# Altium PCB nuc5v2.PcbDoc
Units mm, origin at the board's own origin, x right, y up, seen from the top; angles counter-clockwise.
Board outline 152.4 x 101.6 mm, 2 copper layers (Top Layer, Bottom Layer); 68 components, 69 nets, 315 pads, 155 vias.
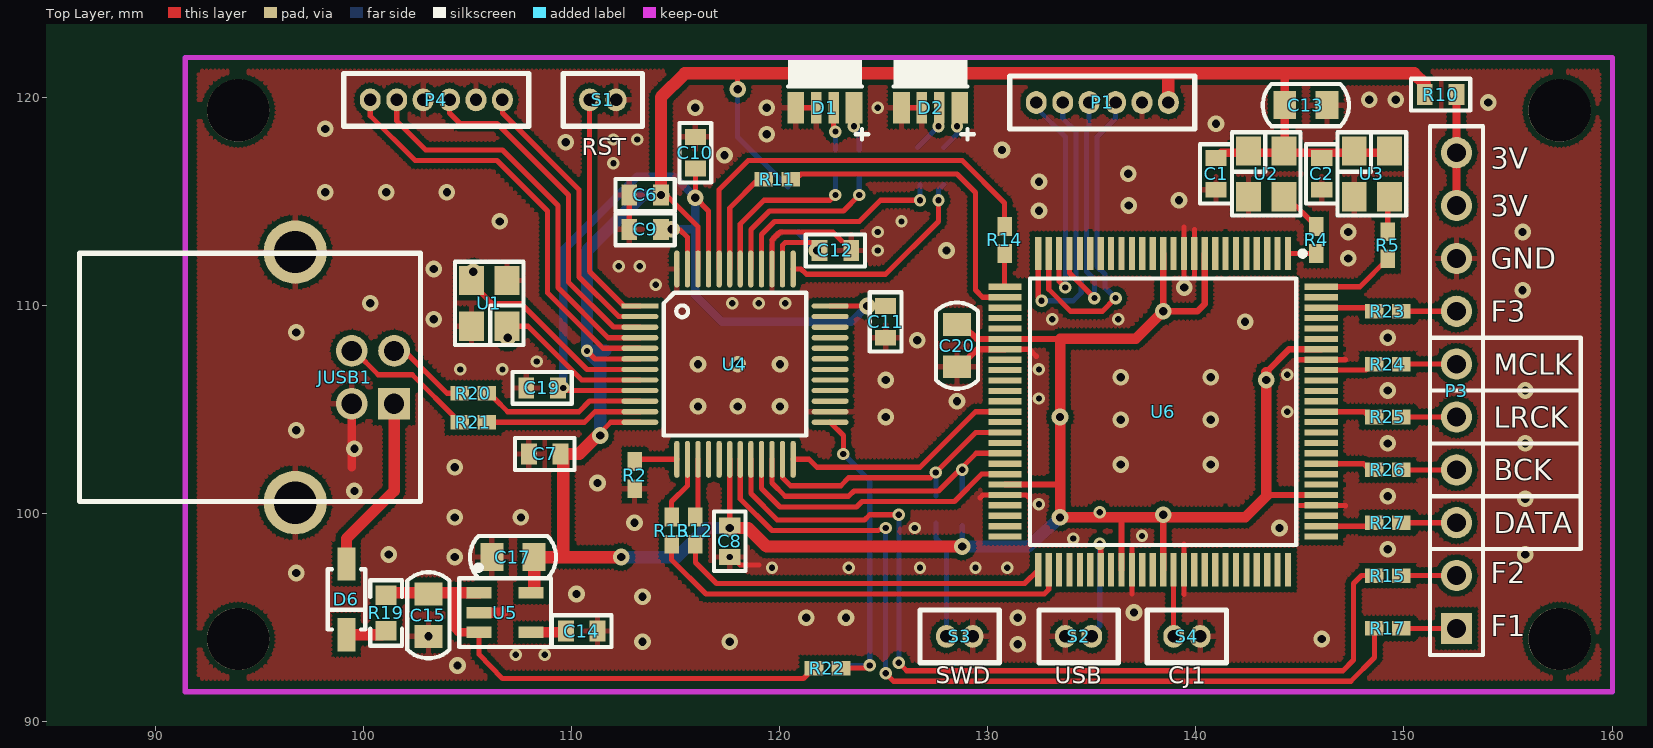
[diagram p0: Top Layer view]
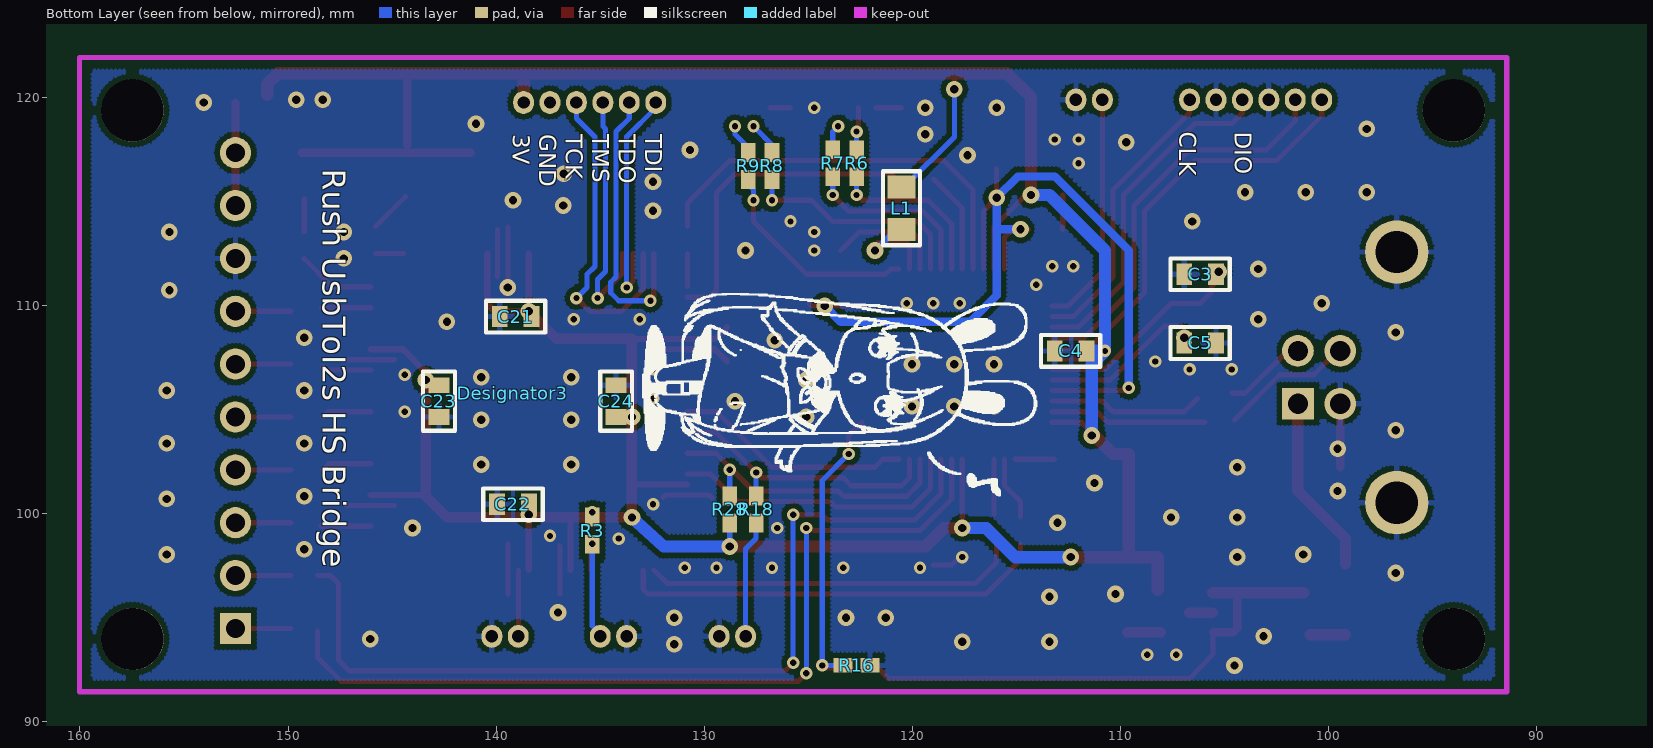
[diagram p1: Bottom Layer view, seen from below]

## Layer stack, top to bottom
Top Layer: signal copper 0.0356
Dielectric: dielectric 0.32, FR-4, Dk 4.8
Bottom Layer: signal copper 0.0356

## Board outline
25.4,25.4 177.8,25.4 177.8,127 25.4,127

## Design rules (kind name [scope] priority, off if disabled: settings)
Clearance Clearance_1 [All] p1: gap=0.254
Clearance [(InComponent('U1'))] p2: gap=0.1
ComponentClearance [All] p1 off: gap=0.254 collisioncheckmode=3 verticalgap=0.254
FanoutControl Fanout_BGA [IsBGA] p1 off: bgadir=Out bgaviamode=Centered fanoutstyle=Auto fanoutdirection=Alternating viagrid=0.025 // Fanout_BGA (Default Rule)
FanoutControl Fanout_LCC [IsLCC] p2 off: bgadir=Out bgaviamode=Centered fanoutstyle=Auto fanoutdirection=Alternating viagrid=0.025 // Fanout_LCC (Default Rule)
FanoutControl Fanout_SOIC [IsSOIC] p3 off: bgadir=Out bgaviamode=Centered fanoutstyle=Auto fanoutdirection=Alternating viagrid=0.025 // Fanout_SOIC (Default Rule)
FanoutControl Fanout_Small [(CompPinCount < 5)] p4 off: bgadir=Out bgaviamode=Centered fanoutstyle=Auto fanoutdirection=OutThenIn viagrid=0.025 // Fanout_Small (Default Rule)
FanoutControl Fanout_Default [All] p5 off: bgadir=Out bgaviamode=Centered fanoutstyle=Auto fanoutdirection=Alternating viagrid=0.025 // Fanout_Default (Default Rule)
Height [All] p1 off: minheight=0 maxheight=25.4 prefheight=12.7
HoleSize [All] p1 off: absolutevalues=TRUE maxlimit=2.54 minlimit=0.025 maxpercent=80.000 minpercent=20.000
LayerPairs [All] p1 off: enforce=TRUE
PasteMaskExpansion [All] p1 off: expansion=0
PolygonConnect [All] p1: connectstyle=Relief reliefconductorwidth=0.254 reliefentries=4 polygonreliefangle="90 Angle"
RoutingCorners [All] p1 off: cornerstyle=45-Degree minsetback=2.54 maxsetback=2.54
RoutingLayers [All] p1 off: top layer_v5=TRUE bottom layer_v5=TRUE
RoutingPriority [All] p1 off: routingpriority=0
RoutingTopology [All] p1 off: topology=Shortest
RoutingVias [All] p1: holewidth=0.711 width=1.27 viastyle="Through Hole" minholewidth=0.711 minwidth=1.27 maxholewidth=0.711 maxwidth=1.27
SolderMaskExpansion [All] p1 off: expansion=0.102
TestPointUsage [All] p1 off: valid=0 allowmultiple=FALSE
Testpoint [All] p1 off: side=15 testpointundercomponent=TRUE minsize=1.016 maxsize=2.54 preferedsize=1.524 minholesize=0 maxholesize=1.016 preferedholesize=0.813 testpointgrid=0.025 style=1023 order=0123456789
Width [All] p1: maxlimit=1 minlimit=0.2 preferedwidth=0.3 toplayer_prefwidth=0.25 bottomlayer_prefwidth=0.25 minimp=50.000000 maximp=50.000000 favimp=50.000000
4 further rules are at their usual default settings.

## Components (designator, comment, footprint, x,y, rotation, side; value= is the part's Value field where it differs from the comment)
C1 "104" 0603 140.97,115.57 r90 top
C2 "104" 0603 146.05,117.094 r270 top
C3 "22p" 0603 105.41,111.506 r0 bottom
C4 "0.1" 0603 111.633,107.823 r0 bottom
C5 "22p" 0603 105.41,108.204 r0 bottom
C6 "0.1" 0603 114.3,115.316 r180 top
C7 "0.1" 0603 107.95,102.87 r0 top
C8 "0.1" 0603 117.602,99.441 r270 top
C9 "0.1" 0603 114.3,113.665 r180 top
C10 "0.1" 0603 115.951,116.586 r90 top
C11 "4.7u" 0603 125.095,109.982 r270 top
C12 "1" 0603 121.92,112.649 r0 top
C13 "10uF" CC0805CAP 145.288,119.634 r180 top
C14 "0.1" 0603 109.728,94.361 r0 top
C15 "10uF" CC0805CAP 103.124,95.123 r90 top
C17 "10uF" CC0805CAP 107.188,97.917 r0 top
C19 "0.1" 0603 109.347,106.045 r180 top
C20 "10u" CC0805CAP 128.524,108.077 r270 top
C21 "0.1" 0603 139.827,109.474 r180 bottom
C22 "0.1" 0603 139.954,100.457 r180 bottom
C23 "0.1" 0603 142.748,104.648 r90 bottom
C24 "0.1" 0603 134.239,106.172 r270 bottom
D1 "DLED" LED1204 122.174,119.507 r270 top
D2 "DLED" LED1204 127.254,119.507 r270 top
D6 "MBR520" SOD123 99.187,95.885 r90 top
Designator3 "Comment" LOGO2 139.192,105.791 r0 bottom
JUSB1 "USB_B" USB-B-M 101.473,105.283 r90 top
L1 "10uH" CC0805RES 120.523,114.681 r270 bottom
P1 "Header 6" 密脚针1.27mm*6 132.334,119.761 r0 top
P3 "Header 10" HDR1X10 152.527,94.488 r90 top locked
P4 "Header 6" 密脚针1.27mm*6 100.33,119.888 r0 top
R2 "12.1K 1%" CR1005-0402 113.03,101.854 r270 top
R3 "1K" CR1005-0402 135.382,99.187 r90 bottom
R4 "22" CR1005-0402 145.796,113.157 r270 top
R5 "22" CR1005-0402 149.225,112.903 r270 top
R6 "2.2k" CR1005-0402 122.682,116.84 r90 bottom
R7 "10k" CR1005-0402 123.825,116.84 r90 bottom
R8 "2.2k" CR1005-0402 126.746,116.713 r90 bottom
R9 "10k" CR1005-0402 127.889,116.713 r90 bottom
R10 "0" 0603 151.003,120.142 r0 top
R11 "220" CR1005-0402 119.888,116.078 r0 top
R12 "220" CR1005-0402 115.951,99.187 r90 top
R13 "220" CR1005-0402 114.808,99.187 r270 top
R14 "220" CR1005-0402 130.81,113.157 r90 top
R15 "220" CR1005-0402 149.225,97.028 r180 top
R16 "20K" CR1005-0402 122.682,92.71 r0 bottom
R17 "220" CR1005-0402 149.225,94.488 r180 top
R18 "1K" CR1005-0402 127.508,100.203 r270 bottom
R19 "2.2" CC0603RES 101.092,95.231 r90 top
R20 "22" CR1005-0402 105.283,105.791 r180 top
R21 "22" CR1005-0402 105.283,104.394 r180 top
R22 "20K" CR1005-0402 122.301,92.583 r180 top
R23 "220" CR1005-0402 149.225,109.728 r0 top
R24 "220" CR1005-0402 149.225,107.188 r180 top
R25 "220" CR1005-0402 149.225,104.648 r180 top
R26 "220" CR1005-0402 149.225,102.108 r0 top
R27 "220" CR1005-0402 149.225,99.568 r0 top
R28 "10K" CR1005-0402 128.778,100.203 r270 bottom
S1 "RESET" 密脚针1.27mm*2 112.141,119.888 r180 top
S2 "USBOOT" 密脚针1.27mm*2 133.731,94.107 r0 top
S3 "SWBOOT" 密脚针1.27mm*2 129.286,94.107 r180 top
S4 "CLKJ1" 密脚针1.27mm*2 140.208,94.107 r180 top
U1 "12M 3225" OSC-3225 106.045,110.109 r90 top
U2 "7050 OSC" OSC-3225 143.383,116.332 r270 top
U3 "7050 OSC" OSC-3225 148.463,116.332 r270 top
U4 "NUC505YL" LQFP-48 113.284,109.982 r270 top
U5 "LDO3.3V" SOT23-5 106.807,95.25 r90 top
U6 "EPM240T100C5" TQFP100 138.43,104.902 r270 top

## Footprints (in the part's own frame and the unit in brackets; to place one, negate y for a bottom-side part, rotate by r counter-clockwise, add the part's x,y. Pads: shape width x height; smd on the part's side, far side on the other; paste and mask are expansions set on the pad)
0603 [mil]
  rect 30x40 smd: 1(0,0) 2(60,0)
  silkscreen extent -26,-30 86,30
CC0603RES [mm]
  rect 0.95x1 smd: 1(-0.85,0) 2(0.85,0)
  silkscreen extent -1.57,-0.76 1.57,0.76
CC0805CAP [mm] "Chip Capacitor; Body 2.0 x 1.2 mm (LxW typ)"
  rect 1.1x1.35 smd: 1(-1.016,0) 2(1.016,0)
  silkscreen extent -2.07,-1.02 2.07,1.02
CC0805RES [mm] "Chip Capacitor; Body 2.0 x 1.2 mm (LxW typ)"
  rect 1.1x1.35 smd: 1(-1.016,0) 2(1.016,0)
  silkscreen extent -1.78,-0.89 1.78,0.89
CR1005-0402 [mm] "Chip Resistor; Body 1.1 x 0.5 mm (LxW typ)"
  rect 0.9x0.7 smd: 1(-0.65,0) 2(0.65,0)
HDR1X10 [mm] "Connector; Header; 10 Position"
  rect 1.5x1.5 hole 0.9: 1(0,0)
  round 1.5 hole 0.9: 2(2.54,0) 3(5.08,0) 4(7.62,0) 5(10.16,0) 6(12.7,0) 7(15.24,0) 8(17.78,0) 9(20.32,0) 10(22.86,0)
  silkscreen extent -1.27,-1.27 24.13,1.27
LED1204 [mm]
  rect 1.5x0.5 smd: 1(0,-0.42) 2(0,0.42)
  rect 1.5x0.8 smd: 3(0,-1.4) 4(0,1.4)
  silkscreen extent -2.01,-1.78 1.52,2.08
LOGO2 [mm]
  silkscreen extent -25.16,-4.77 -6.26,4.91
LQFP-48 [mil]
  rect 10x70 smd: 1(0,0)
  oval 10x70 smd: 2(20,0) 3(40,0) 4(60,0) 5(80,0) 6(100,0) 7(120,0) 8(140,0) 9(160,0) 10(180,0) 11(200,0) 12(220,0) 25(220,360) 26(200,360) 27(180,360) 28(160,360) 29(140,360) 30(120,360) 31(100,360) 32(80,360) 33(60,360) 34(40,360) 35(20,360) 36(0,360)
  oval 70x10 smd: 13(290,70) 14(290,90) 15(290,110) 16(290,130) 17(290,150) 18(290,170) 19(290,190) 20(290,210) 21(290,230) 22(290,250) 23(290,270) 24(290,290) 37(-70,290) 38(-70,270) 39(-70,250) 40(-70,230) 41(-70,210) 42(-70,190) 43(-70,170) 44(-70,150) 45(-70,130) 46(-70,110) 47(-70,90) 48(-70,70)
  silkscreen extent -25,45 245,315
OSC-3225 [mm] "3225晶振"
  rect 1.4x1.2 smd: 1(-1.1,-0.85) 2(1.1,-0.85) 3(1.1,0.85) 4(-1.1,0.85)
  silkscreen extent -2,-1.65 2,1.65
SOD123 [mm] "SOD-123; 2 Leads; Body 2.7 x 1.6 mm, (LxW)"
  rect 1.6x0.85 smd: 1(1.7,0) 2(-1.7,0)
  silkscreen extent -1.45,-0.9 1.45,0.9
SOT23-5 [mm] "SOT-23/SC-74A; 5 Leads; Body 3.1 x 3.1 mm, inc. leads (LxW max)"
  rect 0.55x1.2 smd: 1(0.95,1.25) 2(0,1.25) 3(-0.95,1.25) 4(-0.95,-1.25) 5(0.95,-1.25)
  silkscreen extent -1.65,-2.2 2.29,2.2
TQFP100 [mm] "100-Pin Plastic Thin Quad Flat Pack (TQFP)"
  rect 1.6x0.3 smd: 1(-7.6,6) 2(-7.6,5.5) 3(-7.6,5) 4(-7.6,4.5) 5(-7.6,4) 6(-7.6,3.5) 7(-7.6,3) 8(-7.6,2.5) 9(-7.6,2) 10(-7.6,1.5) 11(-7.6,1) 12(-7.6,0.5) 13(-7.6,0) 14(-7.6,-0.5) 15(-7.6,-1) 16(-7.6,-1.5) 17(-7.6,-2) 18(-7.6,-2.5) 19(-7.6,-3) 20(-7.6,-3.5) 21(-7.6,-4) 22(-7.6,-4.5) 23(-7.6,-5) 24(-7.6,-5.5) 25(-7.6,-6) 51(7.6,-6) 52(7.6,-5.5) 53(7.6,-5) 54(7.6,-4.5) 55(7.6,-4) 56(7.6,-3.5) 57(7.6,-3) 58(7.6,-2.5) 59(7.6,-2) 60(7.6,-1.5) 61(7.6,-1) 62(7.6,-0.5) 63(7.6,0) 64(7.6,0.5) 65(7.6,1) 66(7.6,1.5) 67(7.6,2) 68(7.6,2.5) 69(7.6,3) 70(7.6,3.5) 71(7.6,4) 72(7.6,4.5) 73(7.6,5) 74(7.6,5.5) 75(7.6,6)
  rect 0.3x1.6 smd: 26(-6,-7.6) 27(-5.5,-7.6) 28(-5,-7.6) 29(-4.5,-7.6) 30(-4,-7.6) 31(-3.5,-7.6) 32(-3,-7.6) 33(-2.5,-7.6) 34(-2,-7.6) 35(-1.5,-7.6) 36(-1,-7.6) 37(-0.5,-7.6) 38(0,-7.6) 39(0.5,-7.6) 40(1,-7.6) 41(1.5,-7.6) 42(2,-7.6) 43(2.5,-7.6) 44(3,-7.6) 45(3.5,-7.6) 46(4,-7.6) 47(4.5,-7.6) 48(5,-7.6) 49(5.5,-7.6) 50(6,-7.6) 76(6,7.6) 77(5.5,7.6) 78(5,7.6) 79(4.5,7.6) 80(4,7.6) 81(3.5,7.6) 82(3,7.6) 83(2.5,7.6) 84(2,7.6) 85(1.5,7.6) 86(1,7.6) 87(0.5,7.6) 88(0,7.6) 89(-0.5,7.6) 90(-1,7.6) 91(-1.5,7.6) 92(-2,7.6) 93(-2.5,7.6) 94(-3,7.6) 95(-3.5,7.6) 96(-4,7.6) 97(-4.5,7.6) 98(-5,7.6) 99(-5.5,7.6) 100(-6,7.6)
  silkscreen extent -7.72,-6.4 6.4,6.83
USB-B-M [mil]
  rect 60x60 hole 38: 1(0,0)
  round 60 hole 38: 2(100,0) 3(100,80) 4(0,80)
  round 120 hole 80: 5(-187,187) 5(287,187)
  silkscreen extent -185,-50 285,595
密脚针1.27mm*2 [mm]
  oval 1x1.1 hole 0.6: 1(0,0) 2(1.27,0)
  silkscreen extent -1.27,-1.27 2.54,1.27
密脚针1.27mm*6 [mm]
  oval 1x1.1 hole 0.6: 1(0,0) 2(1.27,0) 3(2.54,0) 4(3.81,0) 5(5.08,0) 6(6.35,0)
  silkscreen extent -1.27,-1.27 7.62,1.27

## Part data
C1 C2: library part Cap6, "Capacitor0603"
C3 C4 C5 C6 C7 C8 C9 C10 C11 C12 C19 C21 C22 C23 C24: library part CAP, "Capacitor"
C13 C14 C15 C17 C20: library part Cap8, "Capacitor0805"
D1 D2: library part LED1204, "1204˫ɫLED"
D6: library part Diode, "Default Diode"
JUSB1: "USB Mini/Micro 5P"
L1: library part Res8, "Resistor0805"
P1 P4: "Header, 6-Pin"
P3: "Header, 10-Pin"
R2 R3 R4 R5 R6 R7 R8 R9 R10 R11 R12 R13 R14 R15 R17 R18 R19 R20 R21 R23 R24 R25 R26 R27 R28: library part Res6, "Resistor0603"
R16 R22: library part R, "贴片电阻"
S1 S2 S4: library part SW-PB
S3: library part SW-PB, "Switch"
U1: library part XTAL
U2 U3: library part XTAL_OSC
U5: library part LP2985-5, "LP2985 5V LDO"
U6: "MAX II 2.5/3.3V CPLD, 80 I/Os, 100-Pin Plastic TQFP, Commercial Temperature, Speed Grade 5"

## Free pads (board coordinates)
  round 3 hole 3 unplated: ""(93.98,93.98) ""(93.98,119.38) ""(157.48,93.98) ""(157.48,119.38)

## Via types
v1: diameter 0.8, hole 0.4, Top Layer to Bottom Layer, 97 vias
v2: diameter 0.6, hole 0.3, Top Layer to Bottom Layer, 58 vias

## Nets (pads, with @x,y where several pads share a name; then routed paths per layer and width w, separated by ;. In a path a pad name is that pad's centre, name@x,y a point inside that pad or via, vN(x,y) a via of type N, cw(c..) or ccw(c..) an arc to the next point about the centre after c; other vN are vias at no path point)
BCK2: R26.1 U6.83 | length 2.4
  Top Layer w0.25: U6.83 148.042,102.402 R26.1@148.336,102.108
BCKO: P3.4 R26.2 | length 2.7
  Top Layer w0.25: R26.2 P3.4
CLK1: R4.1 U2.3 | length 2
  Top Layer w0.25: U2.3@144.371,115.232 R4.1
CLK1': R4.2 U6.1 | length 1.4
  Top Layer w0.25: U6.1 R4.2@145.791,112.502
CLK2: R5.1 U3.3 | length 1.6
  Top Layer w0.25: R5.1 U3.3@149.225,115.144
CLK2': R5.2 U6.100 | length 3.8
  Top Layer w0.25: U6.100 147.874,110.902 R5.2
CLKJMP: S4.2 U6.64 | length 3.1
  Top Layer w0.25: S4.2@138.93,94.242 U6.64
D+: R21.1 U4.11 | length 7.6
  Top Layer w0.25: R21.1 110.617,104.394 111.125,104.902 U4.11
D-: R20.1 U4.10 | length 7.5
  Top Layer w0.25: R20.1@106.299,105.537 106.934,104.902 110.363,104.902 110.871,105.41 U4.10
DATAO: P3.3 R27.2 | length 2.7
  Top Layer w0.25: R27.2 P3.3
DM: JUSB1.2 R20.2 | length 3.5
  Top Layer w0.254: JUSB1.2@101.981,107.823 104.013,105.791 R20.2
DP: JUSB1.3 R21.2 | length 6.3
  Top Layer w0.254: JUSB1.3@99.568,107.823 100.711,106.68 102.347,106.68 R21.2@104.506,104.521
F1: P3.1 R17.1 | length 2.7
  Top Layer w0.25: R17.1 P3.1
F2: P3.2 R15.1 | length 2.7
  Top Layer w0.25: R15.1 P3.2
F3: P3.7 R23.2 | length 2.7
  Top Layer w0.25: R23.2 P3.7
GND: C1.1 C2.2 C3.2 C4.2 C5.1 C6.2 C7.1 C8.2 C9.2 C10.2 C11.2 C12.2 C13.1 C14.2 C15.1 C17.1 C19.2 C20.2 C21.1 C22.1 C23.1 C24.1 D1.1 D1.3 D2.1 D2.3 JUSB1.4 JUSB1.5 P1.5 P3.8 P4.3 P4.5 R2.2 R16.1 S1.1 S2.1 S3.1 S4.1 U1.2 U1.4 U2.2 U3.2 U4.26 U4.39 U4.48 U5.2 U6.10 U6.11 U6.32 U6.46 U6.60 U6.65 U6.79 U6.93 | length 35.8
  Top Layer w0.25: C8.2@117.856,97.79 118.11,97.536 118.999,97.536 ; U4.39 119.634,113.157 120.015,113.538 122.555,113.538 C12.2 ; D1.3@120.523,119.507 D1.1 ; D2.3 D2.1 ; 129.642,100.768 129.776,100.902 131.871,100.902 131.986,100.787 ; U6.32 132.001,107.902 132.334,107.569 ; 136.93,96.138 136.93,98.431 136.957,98.458 ; 139.43,96.133 139.43,98.536 ; v1@139.43,110.887 139.43,113.776 ; 139.93,111.38 139.93,113.652 ; 144.88,107.402 147.18,107.402 ; 144.896,100.402 147.164,100.402 147.186,100.381
  Top Layer w0.254: C9.2 C6.2
  Top Layer w0.3: C20.2@128.905,107.315 129.492,107.902 U6.32
  Top Layer w0.4: 99.441,102.231 JUSB1.4
  Top Layer w0.5: U5.2 106.705,95.25
  other v1: 104.521,92.71 131.445,93.726 113.411,93.853 117.602,93.853 146.05,93.98 103.124,94.107 121.285,94.996 123.19,94.996 131.445,94.996 137.033,95.25 113.411,96.012 110.236,96.139 96.774,97.155 104.394,97.917 101.219,98.044 155.829,98.044 149.225,98.298 144.018,99.314 113.03,99.568 104.394,99.822 107.569,99.822 155.829,100.711 149.225,100.838 99.568,101.092 111.252,101.473 104.394,102.235 136.398,102.362 140.716,102.362 99.568,103.124 149.225,103.378 155.829,103.378 96.774,104.013 136.398,104.521 140.716,104.521 125.095,104.648 116.078,105.156 117.983,105.156 120.015,105.156 128.524,105.41 149.225,105.918 155.829,105.918 125.095,106.426 136.398,106.553 140.716,106.553 116.078,107.188 117.983,107.188 120.015,107.188 126.619,108.331 149.225,108.458 96.774,108.712 142.367,109.22 103.378,109.347 100.33,110.109 155.702,110.744 139.446,110.871 103.378,111.76 147.32,112.268 128.016,112.649 147.32,113.538 155.702,113.538 106.553,114.046 132.461,114.554 136.779,114.808 139.192,115.062 98.171,115.443 101.092,115.443 104.013,115.443 132.461,115.951 136.754,116.332 117.348,117.221 130.683,117.475 109.728,117.856 119.38,118.237 98.171,118.491 140.97,118.745 115.951,119.507 119.38,119.507 154.051,119.761 148.336,119.888 149.606,119.888
  other v2: 107.315,93.218 108.712,93.218 119.634,97.409 123.317,97.409 126.746,97.409 129.413,97.409 130.937,97.409 117.602,97.917 134.112,98.806 137.414,98.933 126.492,99.314 132.461,100.457 144.399,104.902 132.461,105.537 144.399,106.68 104.648,106.934 106.68,106.934 132.461,106.934 108.331,107.315 133.096,109.347 136.271,109.347 117.729,110.109 118.999,110.109 120.269,110.109 114.046,110.998 112.268,111.887 113.284,111.887 124.714,112.649 124.714,113.538 125.857,114.046 112.014,116.84 112.014,117.983 113.157,117.983 124.714,119.507
HSE-I: C3.1 U1.3 U4.7 | length 9.9
  Top Layer w0.25: U1.3@105.322,111.209 105.62,110.911 105.62,110.661 106.172,110.109 107.569,110.109 110.744,106.934 U4.7
  other v1: 105.283,111.633
HSE-O: C5.2 U1.1 U4.8 | length 7.3
  Top Layer w0.25: U1.1@107.022,109.009 107.907,109.009 110.49,106.426 U4.8
  other v1: 106.934,108.458
LRCK2: R25.2 U6.88 | length 2.4
  Top Layer w0.25: U6.88 148.082,104.902 R25.2@148.336,104.648
LRCKO: P3.5 R25.1 | length 2.7
  Top Layer w0.25: R25.1 P3.5
MCLK2: R24.2 U6.92 | length 2.4
  Top Layer w0.25: U6.92 148.177,106.902 R24.2@148.336,107.061
MCLKO: P3.6 R24.1 | length 2.7
  Top Layer w0.25: R24.1 P3.6
MCUBCK: R12.1 U6.51 | length 18
  Top Layer w0.25: R12.1 115.951,97.663 116.967,96.647 131.775,96.647 U6.51
MCUDI: R11.2 U6.27 | length 15.6
  Top Layer w0.25: R11.2 120.777,116.078 121.031,116.332 128.524,116.332 129.413,115.443 129.413,110.744 129.755,110.402 U6.27
MCUDO: R14.1 U6.26 | length 1.6
  Top Layer w0.25: U6.26@130.81,110.922 R14.1
MCULRCK: R13.2 U6.52 | length 20.6
  Top Layer w0.25: R13.2 114.808,97.79 116.459,96.139 132.715,96.139 132.93,96.354 U6.52
NetC14_1: C14.1 U5.4 | length 1.7
  Top Layer w0.25: C14.1@109.667,94.3 C14.1
  Top Layer w0.5: U5.4 C14.1@109.667,94.3
NetC15_2: C15.2 R19.2 R22.2 U5.1 U5.3 | length 25.2
  Top Layer w0.25: U5.3 105.557,93.249 106.68,92.075 121.143,92.075 R22.2
  Top Layer w0.4: 104.394,96.2 104.394,94.488 104.582,94.3 U5.3
  Top Layer w0.55: R19.2@101.192,96.2 U5.1
NetD1_2: D1.2 R6.2 | length 2.1
  Top Layer w0.25: v2@122.594,118.452 D1.2
  Bottom Layer w0.25: R6.2 v2(122.682,118.364) v2@122.824,118.364
NetD1_4: D1.4 R7.2 | length 1.2
  Bottom Layer w0.25: v2(123.571,118.618) 123.825,118.364 R7.2
NetD2_2: D2.2 R8.2 | length 1.4
  Bottom Layer w0.25: R8.2@126.619,117.602 v2(127.635,118.618)
NetD2_4: D2.4 R9.2 | length 1.3
  Bottom Layer w0.25: R9.2@127.889,117.602 128.524,118.237 v2(128.524,118.618)
NetP3_9: P3.9 P3.10 R10.2 | length 5
  Top Layer w0.4: P3.9 R10.2@152.527,119.761
NetR2_1: R2.1 U4.13 | length 1.9
  Top Layer w0.25: R2.1@113.172,102.616 U4.13
PA0: R8.1 U4.40 | length 10.7
  Top Layer w0.25: U4.40 119.126,113.411 119.761,114.046 123.825,114.046 124.841,115.062 v2(126.746,115.062)
  Bottom Layer w0.25: v2(126.746,115.062) R8.1@126.746,115.809
PA1: R7.1 U4.41 | length 8.7
  Top Layer w0.25: U4.41 118.618,113.665 119.507,114.554 123.063,114.554 v2(123.825,115.316)
  Bottom Layer w0.25: v2(123.825,115.316) R7.1
PA2: R6.1 U4.42 | length 8.2
  Top Layer w0.25: U4.42 118.11,113.919 119.253,115.062 122.428,115.062 v2(122.682,115.316)
  Bottom Layer w0.25: v2(122.682,115.316) R6.1
PA3: R11.1 U4.43 | length 4.9
  Top Layer w0.25: U4.43 117.602,114.696 R11.1@118.984,116.078
PA4: R14.2 U4.44 | length 20.1
  Top Layer w0.25: U4.44 117.094,115.57 118.491,116.967 128.778,116.967 130.81,114.935 R14.2
PA8: R13.1 U4.14 | length 3.1
  Top Layer w0.25: R13.1 114.808,100.584 115.57,101.346 U4.14
PA9: R12.2 U4.15 | length 2.7
  Top Layer w0.25: R12.2@116.078,99.964 U4.15
PA10: U4.16
PA11: U4.17
PB0: R17.2 U4.19 | length 42.1
  Top Layer w0.25: U4.19 118.11,100.711 119.634,99.187 124.714,99.187 v2(125.095,99.314) ; v2(125.095,92.329) 125.476,91.948 147.447,91.948 148.59,93.091 R17.2@148.59,94.361
  Bottom Layer w0.25: v2@125.095,92.202 v2(125.095,99.314)
PB1: R15.2 U4.20 | length 43.7
  Top Layer w0.25: U4.20 118.618,100.965 119.888,99.695 124.079,99.695 124.333,99.949 v2(125.73,99.949) ; v2(125.73,92.837) 126.111,92.456 147.066,92.456 147.574,92.964 147.574,96.647 147.955,97.028 R15.2@148.59,97.028
  Bottom Layer w0.25: v2@125.73,92.71 v2(125.73,99.949)
PB2: U4.21 U6.44 | length 14.1
  Top Layer w0.25: U4.21 119.126,101.219 120.015,100.33 123.698,100.33 123.952,100.584 128.397,100.584 129.715,101.902 U6.44
PB3: R28.1 U4.22 U6.42 | length 14.4
  Top Layer w0.25: U4.22 119.634,101.473 120.269,100.838 123.317,100.838 123.571,101.092 127.635,101.092 129.445,102.902 U6.42
  Bottom Layer w0.25: R28.1@128.778,101.092 v2@128.778,102.078
  other v2: 128.778,102.108
PB4: R18.1 U4.23 U6.40 | length 13.9
  Top Layer w0.25: U4.23 120.142,101.727 120.523,101.346 122.936,101.346 123.317,101.727 127.254,101.727 129.429,103.902 U6.40
  Bottom Layer w0.25: R18.1 v2(127.508,101.981)
PB5: U4.24 U6.38 | length 11.4
  Top Layer w0.25: U4.24 121.412,102.616 121.793,102.235 126.746,102.235 129.413,104.902 U6.38
PB14: P4.2 U4.4 | length 19.4
  Top Layer w0.25: P4.2@101.6,120.015 101.6,118.872 102.997,117.475 106.68,117.475 109.347,114.808 109.347,110.871 111.76,108.458 U4.4
PB15: P4.1 U4.5 | length 20.8
  Top Layer w0.25: P4.1@100.33,120.015 100.33,119.126 102.489,116.967 106.426,116.967 108.839,114.554 108.839,110.617 111.506,107.95 U4.5
PD4: R9.1 U4.37 | length 10
  Top Layer w0.25: U4.37 121.031,111.76 121.285,111.506 125.095,111.506 127.635,114.046 v2(127.635,115.062)
  Bottom Layer w0.25: v2(127.635,115.062) 127.635,115.57 R9.1@127.889,115.824
RST: S1.2 U4.1 | length 11.5
  Top Layer w0.25: S1.2@110.871,120.015 110.871,111.633 112.522,109.982 U4.1
SCFG0SET: R3.1 S2.2 U6.57 | length 5.5
  Top Layer w0.25: U6.57 v2@135.43,98.504
  Bottom Layer w0.25: S2.2@135.128,94.361 135.382,94.615 v2(135.382,98.552)
SDI2: R23.1 U6.98 | length 2.4
  Top Layer w0.25: U6.98 R23.1@148.401,109.902
SDO2: R27.1 U6.77 | length 2.4
  Top Layer w0.25: U6.77 R27.1@148.409,99.402
SWCLK: P4.6 U4.2 | length 13.9
  Top Layer w0.25: P4.6@106.68,120.015 106.68,119.253 110.363,115.57 110.363,111.379 112.268,109.474 U4.2
SWDAT: P4.4 U4.3 | length 16.6
  Top Layer w0.25: P4.4@104.14,120.015 104.14,119.253 104.648,118.745 106.426,118.745 109.855,115.316 109.855,111.125 112.014,108.966 U4.3
SYSCFG3: R18.2 S3.2 | length 5.7
  Bottom Layer w0.25: R18.2 127.508,98.806 128.016,98.298 S3.2
TCK: P1.4 U6.24 | length 15.8
  Top Layer w0.25: U6.24 132.93,110.783 133.985,109.728 135.509,109.728 v2(136.144,110.363)
  Bottom Layer w0.25: v2(136.144,110.363) 135.636,110.871 135.636,111.506 135.255,111.887 135.255,118.11 136.144,118.999 P1.4
TDI: P1.1 U6.23 | length 11
  Top Layer w0.25: U6.23 133.43,111.172 v2(133.731,110.871)
  Bottom Layer w0.25: P1.1@132.334,119.507 133.731,118.11 v2(133.731,110.871)
TDO: P1.2 U6.25 | length 13.9
  Top Layer w0.25: U6.25 132.43,110.394 v2(132.588,110.236)
  Bottom Layer w0.25: v2(132.588,110.236) 134.112,110.236 134.493,110.617 134.493,111.125 134.239,111.379 134.239,118.364 133.604,118.999 P1.2
TMS: P1.3 U6.22 | length 12.2
  Top Layer w0.25: U6.22 133.93,111.561 v2(135.128,110.363)
  Bottom Layer w0.25: P1.3 134.874,118.618 134.747,118.491 134.747,111.633 135.128,111.252 v2(135.128,110.363)
UDET: R16.2 R22.1 U4.25 | length 14.7
  Top Layer w0.25: U4.25 123.063,103.759 v2(123.063,102.87) ; R22.1 v2@124.206,92.583
  Bottom Layer w0.25: v2(123.063,102.87) 124.333,101.6 v2(124.333,92.71) R16.2
VBUS: D6.1 JUSB1.1 | length 8.5
  Top Layer w0.55: D6.1 99.187,98.806 101.473,101.092 JUSB1.1@101.473,105.156
VCC_1V2: C9.1 C10.1 C11.1 C19.1 U4.9 U4.36 U4.45 U4.47 | length 44
  Top Layer w0.25: v2(109.601,106.045) 109.728,105.918 U4.9 ; C9.1@114.427,113.665 115.189,113.665 115.57,113.284 U4.47 ; C10.1 v1(115.951,115.189) 116.586,114.554 U4.45 ; U4.36 124.841,109.982 C11.1@124.968,110.109
  Bottom Layer w0.4: v2(109.601,106.045) 109.601,112.649 113.157,116.205 114.935,116.205 v1(115.951,115.189) 115.951,110.49 117.221,109.22 123.444,109.22 v1(124.206,109.982) ; v1(114.808,113.665) 115.951,113.665
VDD: C1.2 C2.1 C4.1 C6.1 C7.2 C8.1 C13.2 C17.2 C20.1 C21.2 C22.2 C23.2 C24.2 L1.1 P1.6 R3.2 R10.1 R28.2 U2.1 U2.4 U3.1 U3.4 U4.6 U4.12 U4.18 U4.46 U5.5 U6.9 U6.13 U6.31 U6.45 U6.59 U6.63 U6.80 U6.94 | length 181.2
  Top Layer w0.25: v2(110.744,107.823) 111.125,107.442 U4.6 ; v1@111.252,103.759 111.887,104.394 U4.12 ; v1(112.395,97.917) v1@112.522,97.79 ; v1(114.3,115.316) 114.554,115.316 116.078,113.792 U4.46 ; C8.1 U4.18 ; C8.1@117.602,99.568 C8.1@117.856,99.314 ; v1(117.983,120.396) 117.983,121.158 ; v1@133.477,99.949 v1@133.604,99.822
  Top Layer w0.3: C20.1@128.905,108.966 129.469,108.402 133.477,108.402 ; U6.45 133.406,101.402 ; U6.59 136.43,99.79 ; U6.63 v1@138.43,99.822 ; v1(138.43,109.728) 140.081,109.728 140.43,110.077 U6.9 ; v1@138.43,109.855 U6.13 ; v1@143.383,106.807 144.478,107.902 U6.94 ; 143.446,100.902 U6.80
  Top Layer w0.4: C1.2@141.224,117.348 U3.4@149.352,117.348 ; U2.4@144.272,117.729 144.272,121.031
  Top Layer w0.5: v1@133.477,99.949 133.477,108.402 137.104,108.402 v1(138.43,109.728) ; v1@133.604,99.822 142.366,99.822 143.446,100.902 ; 143.383,100.839 v1@143.383,106.807
  Top Layer w0.6: U5.5@108.204,96.347 C17.2 v1(112.395,97.917) ; 109.601,97.917 109.601,102.87 110.363,102.87 v1@111.252,103.759 ; v1(114.3,115.316) 114.3,120.015 115.443,121.158 150.495,121.158 151.003,120.65 R10.1 ; C8.1@117.856,99.314 118.491,99.314 119.38,98.425 v1(128.778,98.425) ; P1.6@138.684,120.015 138.684,121.158
  Bottom Layer w0.25: v1(117.983,120.396) 117.983,118.11 L1.1@120.396,115.697 ; v1(128.778,98.425) R28.2@128.778,99.441
  Bottom Layer w0.6: v1(111.379,103.759) 111.379,107.188 v2(110.744,107.823) ; C4.1 v2(110.744,107.823) ; v1(112.395,97.917) 115.062,97.917 116.459,99.314 v1(117.602,99.314) ; v1(114.3,115.316) 113.411,115.316 110.744,112.649 v2(110.744,107.823) ; v1(128.778,98.425) 131.953,98.425 v1(133.477,99.822)
  other v1: 138.43,99.949 133.477,104.648 143.383,106.426
  other v2: 135.382,100.076
VDDA: C12.1 L1.2 U4.38 | length 4.3
  Top Layer w0.25: U4.38 120.142,112.903 120.269,113.03 121.666,113.03 C12.1@121.92,112.776
  Bottom Layer w0.3: L1.2@120.904,113.538 v1(121.793,112.649)
VIN: D6.2 R19.1 | length 1.7
  Top Layer w0.55: D6.2 R19.1@100.877,94.185
pads on no net: U4.27 U4.28 U4.29 U4.30 U4.31 U4.32 U4.33 U4.34 U4.35 U6.2 U6.3 U6.4 U6.5 U6.6 U6.7 U6.8 U6.12 U6.14 U6.15 U6.16 U6.17 U6.18 U6.19 U6.20 U6.21 U6.28 U6.29 U6.30 U6.33 U6.34 U6.35 U6.36 U6.37 U6.39 U6.41 U6.43 U6.47 U6.48 U6.49 U6.50 U6.53 U6.54 U6.55 U6.56 U6.58 U6.61 U6.62 U6.66 U6.67 U6.68 U6.69 U6.70 U6.71 U6.72 U6.73 U6.74 U6.75 U6.76 U6.78 U6.81 U6.82 U6.84 U6.85 U6.86 U6.87 U6.89 U6.90 U6.91 U6.95 U6.96 U6.97 U6.99

## Polygon pours and split planes (outlines as drawn)
GND on Top Layer (hatched 90Degree grid 0 track 0.203, remove dead copper): 92.075,121.285 92.075,92.075 159.385,92.075 159.385,121.285
GND on Bottom Layer (hatched 90Degree grid 0 track 0.203, remove dead copper): 92.075,121.285 92.075,92.075 159.385,92.075 159.385,121.285

## Keep-outs
Keep-Out Layer:
  lines w0.254: 91.44,91.44 160.02,91.44 160.02,121.92 91.44,121.92 91.44,91.44

## Silkscreen, mask and mechanical layers (free items; w line width, h text height)
Top Overlay:
  rectangle: 120.396,120.523 123.952,121.793
  rectangle: 125.476,120.523 129.032,121.793
  lines w0.2: 151.257,98.298 158.496,98.298 158.496,108.458 151.257,108.458 ; 151.257,100.838 158.496,100.838 ; 151.257,103.378 158.496,103.378 ; 151.257,105.918 158.496,105.918
  text "RST" at 110.49,117.221 h0.8
  text "3V" at 154.178,116.586 h1
  text "3V" at 154.178,114.3 h1
  text "GND" at 154.178,111.76 h1
  text "F3" at 154.178,109.22 h1
  text "MCLK" at 154.305,106.68 h1
  text "LRCK" at 154.305,104.14 h1
  text "BCK" at 154.305,101.6 h1
  text "DATA" at 154.305,99.06 h1
  text "F2" at 154.178,96.647 h1
  text "F1" at 154.178,94.107 h1
  text "SWD" at 127.508,91.821 h0.8
  text "USB" at 133.223,91.821 h0.8
  text "CJ1" at 138.684,91.821 h0.8
Bottom Overlay:
  text "DIO" at 104.521,118.364 h0.8 r90
  text "CLK" at 107.188,118.364 h0.8 r90
  text "TDI" at 132.842,118.237 h0.8 r90
  text "TDO" at 134.112,118.237 h0.8 r90
  text "TMS" at 135.382,118.237 h0.8 r90
  text "TCK" at 136.652,118.237 h0.8 r90
  text "GND" at 137.922,118.237 h0.8 r90
  text "3V" at 139.192,118.237 h0.8 r90
  text "Rush UsbToI2s HS Bridge" at 148.336,116.586 h1.1 r90